# Altium PCB 拉线式变速器-V3.PcbDoc
Units mm, origin at the board's own origin, x right, y up, seen from the top; angles counter-clockwise.
Board outline 55 x 15.8 mm, 4 copper layers (Top Layer, GND, VCC, Bottom Layer), stack 0.778 mm thick; 60 components, 53 nets, 226 pads, 79 vias.
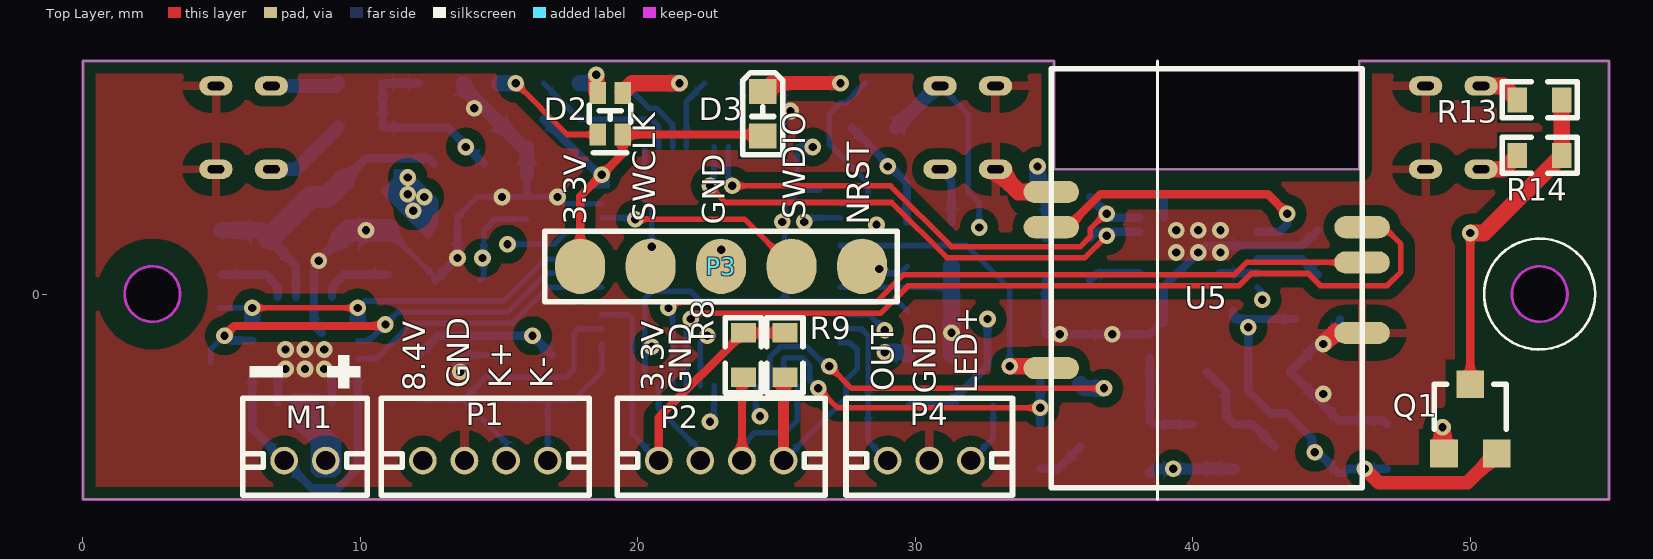
[diagram p0: Top Layer view]
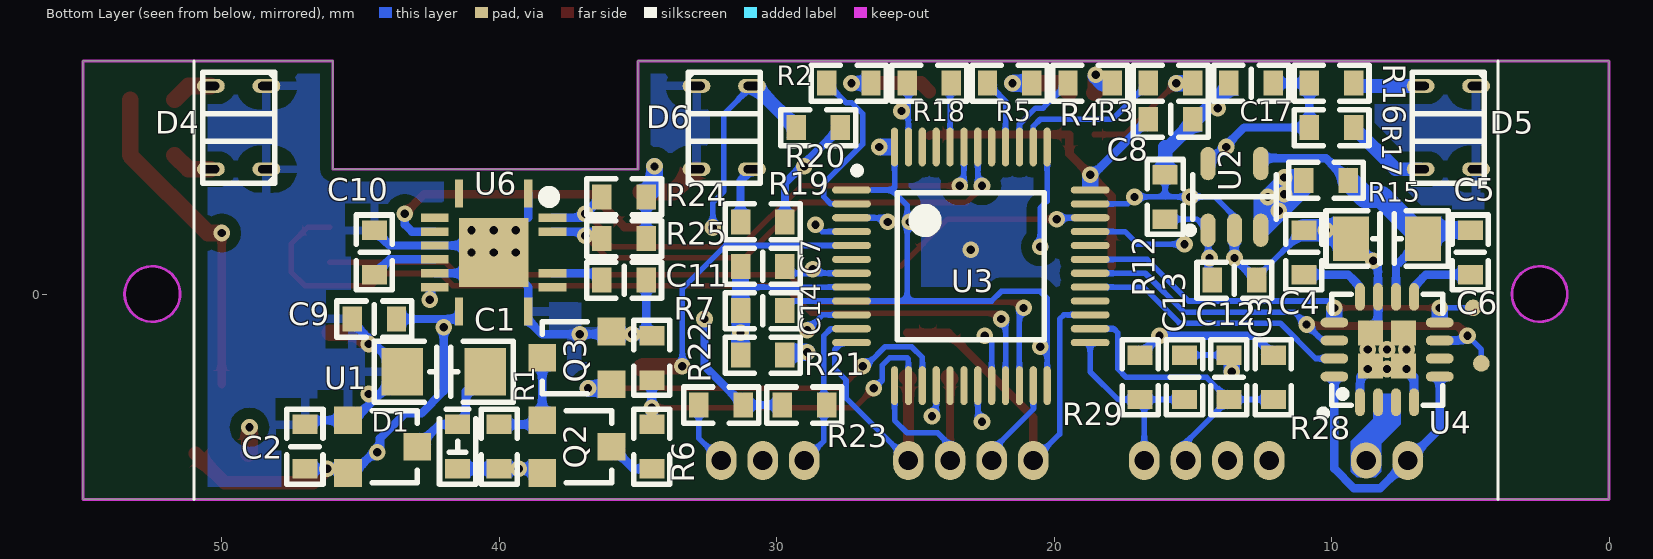
[diagram p1: Bottom Layer view, seen from below]
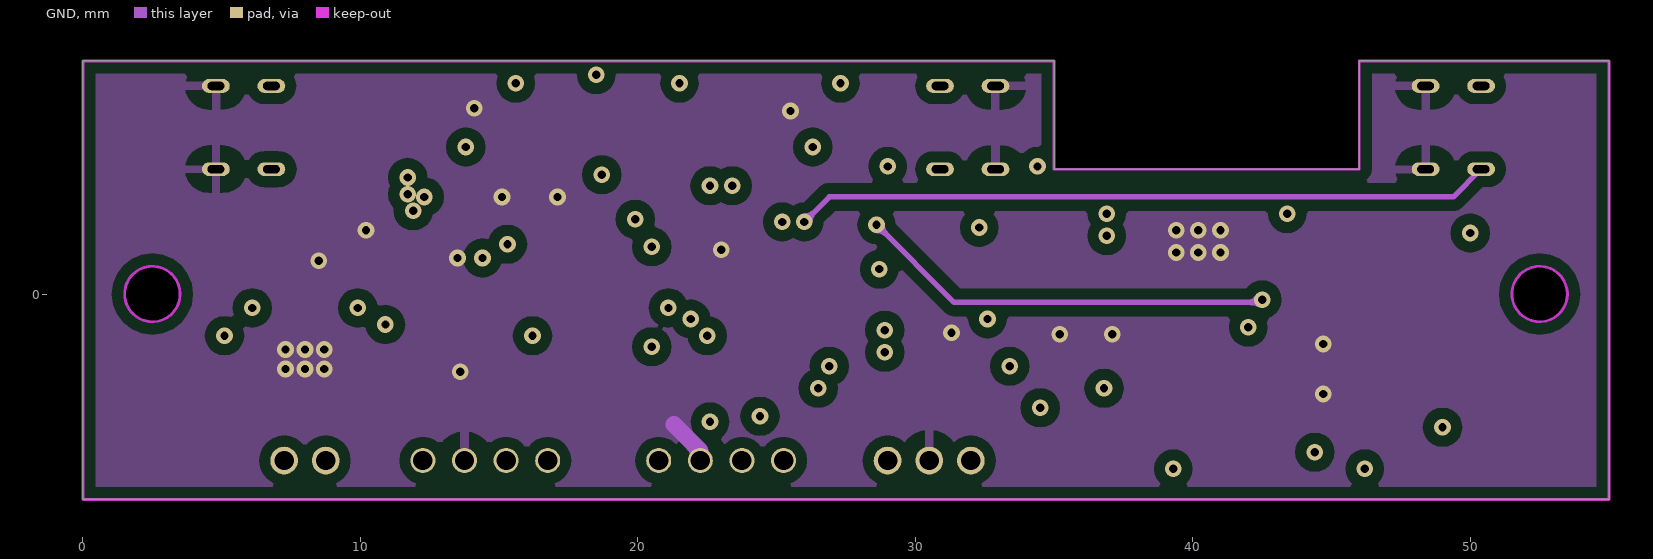
[diagram p2: GND]
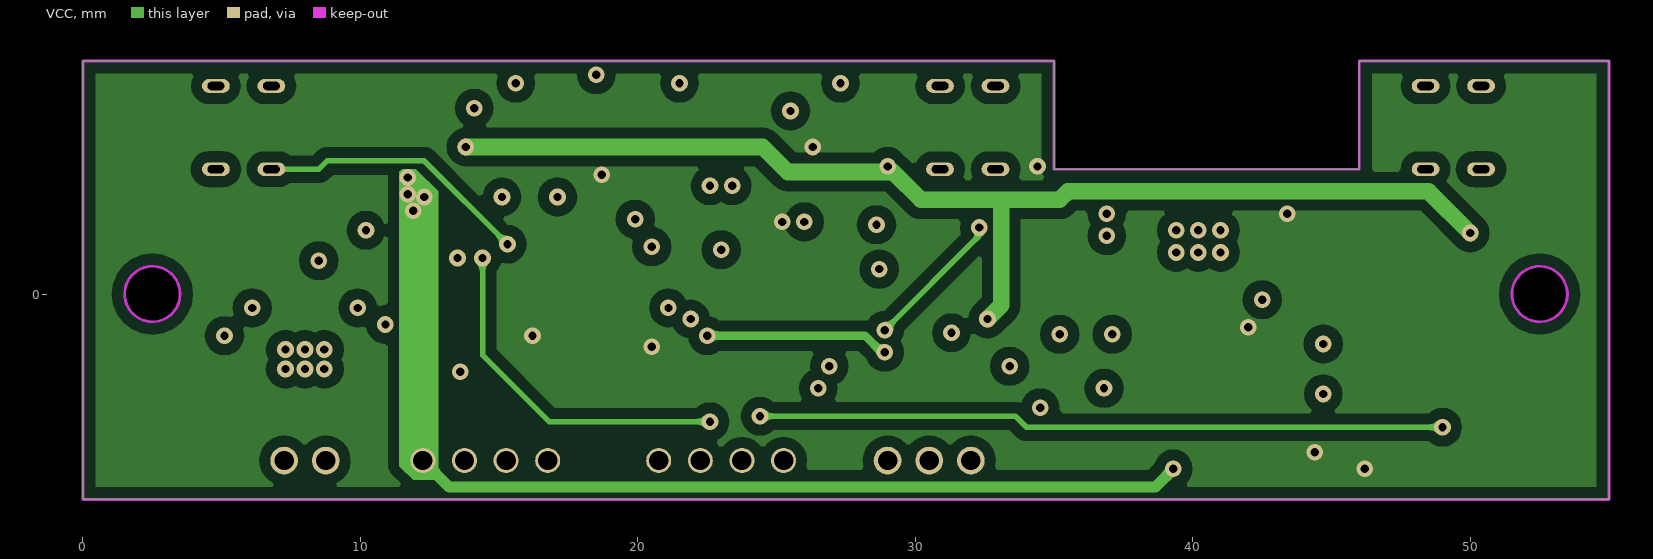
[diagram p3: VCC]
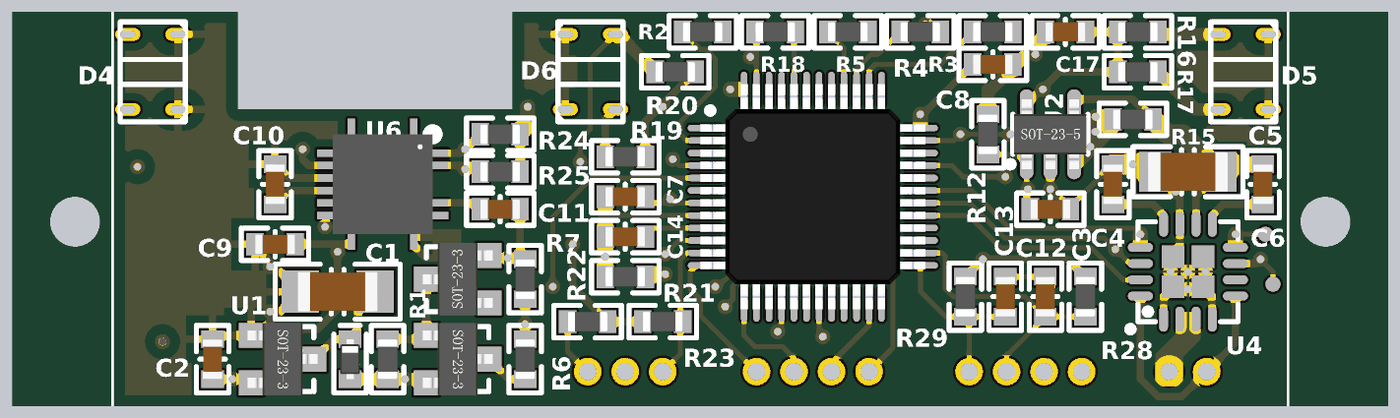
[diagram p4: 3D render of the assembled board from below, using the file's embedded part models]

## Layer stack, top to bottom
Top Solder: solder mask 0.0102, Solder Resist, Dk 3.5
Top Layer: signal copper 0.0356
Dielectric1: core 0.254, FR-4, Dk 4.2
GND: signal copper 0.036
Dielectric 3: prepreg 0.127, Dk 4.2
VCC: signal copper 0.036
Dielectric2: core 0.254, Dk 4.2
Bottom Layer: signal copper 0.0356
Bottom Solder: solder mask 0.0102, Solder Resist, Dk 3.5

## Board outline
0,-7.4 0,8.4 35,8.4 35,4.5 46,4.5 46,8.4 55,8.4 55,-7.4
cut-out: 2.5,-1 cw(c2.5,0) 1.5,0 cw(c2.5,0) 2.5,1 cw(c2.5,0) 3.5,0 cw(c2.5,0)
cut-out: 52.5,-1 cw(c52.5,0) 51.5,0 cw(c52.5,0) 52.5,1 cw(c52.5,0) 53.5,0 cw(c52.5,0)

## Design rules (kind name [scope] priority, off if disabled: settings)
Clearance Clearance敷铜间隔 [InPolygon] p1: gap=0.4
Clearance Clearance通用间隔 [All] p2: gap=0.2
PlaneConnect [All] p1: planeconnectstyle=Relief reliefexpansion=0.508 reliefentries=4 reliefconductorwidth=0.3 reliefairgap=0.3
PolygonConnect PolygonConnect_过孔 [All vs IsVia] p1: connectstyle=Direct reliefconductorwidth=0.254 reliefentries=4 polygonreliefangle="90 Angle" airgapwidth=0.254
PolygonConnect [All] p2: connectstyle=Relief reliefconductorwidth=0.3 reliefentries=4 polygonreliefangle="90 Angle" airgapwidth=0.6
RoomDefinition 拉线式变速器-V3 [InComponentClass('拉线式变速器-V3')] p1: confinementstyle=ConfineIn formatcopy=TRUE lockcomponents=FALSE outline -138.242,-244.193 -87.442,-244.193 -87.442,-218.793 -138.242,-218.793
RoutingVias [All] p1: holewidth=0.5 width=1 viastyle="Through Hole" minholewidth=0.4 minwidth=0.8 maxholewidth=10 maxwidth=10
SolderMaskExpansion [All] p1: expansion=0.102
Width [All] p1: maxlimit=10 minlimit=0.2 preferedwidth=0.5
29 further rules are at their usual default settings.

## Components (designator, comment, footprint, x,y, rotation, side; value= is the part's Value field where it differs from the comment)
C1 "107" C-1206 42,-2.8 r180 bottom
C2 "106" C-0603-M 47,-5.5 r270 bottom
C3 "103" C-0603-M 13.5,0.5 r180 bottom
C4 "225" C-0603-M 11,1.5 r270 bottom
C5 "100UF" C-1206-M 8,2 r180 bottom
C6 "103" C-0603-M 5,1.5 r270 bottom
C7 "104" C-0603-M 30.5,1 r180 bottom
C8 "105" C-0603-M 15.8,6.3 r180 bottom
C9 "104" C-0603-m 44.5,-0.9 r0 bottom
C10 "104" C-0603-m 44.5,1.5 r90 bottom
C11 "222" C-0603-m 35.5,0.5 r180 bottom
C12 "104" C-0603-M 13.7,-3 r270 bottom
C13 "104" C-0603-M 15.3,-3 r270 bottom
C14 "104" C-0603-M 30.5,-0.6 r0 bottom
C17 "104" C-0603-M 12.9,7.6 r0 bottom
D1 "SS14" D-0603-M 41.5,-5.5 r270 bottom
D2 "LED-1615-三色" LED-1615-三色 19,6.5 r0 top
D3 "LED-0603-Blue" LED-0603-Blue 24.5,6.5 r270 top
D4 "GP1S21" RPI-124 49.39,6 r270 bottom
D5 "GP1S21" RPI-124 5.79,6 r270 bottom
D6 "GP1S21" RPI-124 31.89,6 r90 bottom
M1 "" ZH1.5-2P-插件-直针 8,-6 r0 top
P1 "" ZH1.5-4P-插件-直针 14.5,-6 r0 top
P2 "踏频，速度" ZH1.5-4P-插件-直针 23,-6 r0 top
P3 "" 5P下载口 23,1 r0 top locked
P4 "转速" ZH1.5-3P-插件-直针 30.5,-6 r0 top
Q1 "SI2301" SOT-23 50,-4.5 r270 top
Q2 "SI2301" SOT-23 37.2,-5.5 r0 bottom
Q3 "2N7002" SOT-23 37.2,-2.3 r180 bottom
R1 "10K" R-0603-M 40,-5.5 r90 bottom
R2 "100" R-0603-M 27.4,7.6 r180 bottom
R3 "100" R-0603-M 15.8,7.6 r180 bottom
R4 "100" R-0603-M 18.7,7.6 r180 bottom
R5 "100" R-0603-M 21.6,7.6 r180 bottom
R6 "20K-1%" R-0603-M 34.5,-5.5 r90 bottom
R7 "10K-1%" R-0603-M 34.5,-2.3 r90 bottom
R8 "10K" R-0603-m 23.8,-2.2 r270 top
R9 "10K" R-0603-m 25.3,-2.2 r270 top
R12 "250K" R-0603-m 16,3.5 r270 bottom
R13 "1K" R-0603-m 52.5,7 r0 top
R14 "20K" R-0603-m 52.5,5 r0 top
R15 "0.02" R-0603-m 10.2,4.1 r0 bottom
R16 "1K" R-0603-m 10,7.6 r0 bottom
R17 "20K" R-0603-m 10,6 r0 bottom
R18 "4.7K" R-0603-m 24.5,7.6 r0 bottom
R19 "1K" R-0603-m 30.5,2.6 r180 bottom
R20 "20K" R-0603-m 28.5,6 r180 bottom
R21 "4.7K" R-0603-m 30.5,-2.2 r0 bottom
R22 "220" R-0603-m 32,-4 r180 bottom
R23 "10K" R-0603-m 29,-4 r0 bottom
R24 "4.7K" R-0603-M 35.5,3.5 r180 bottom
R25 "4.7K" R-0603-M 35.5,2 r180 bottom
R28 "10K" R-0603-m 12.1,-3 r270 bottom
R29 "10K" R-0603-m 16.9,-3 r270 bottom
U1 "SE8533-LF" SOT-23 44.2,-5.5 r0 bottom
U2 "INA138" SOT-23-5-N 13.5,3.5 r270 bottom
U3 "GD32F103C8T6" LQFP48-L 23,1 r270 bottom locked
U4 "DRV8833RTY" QFN-16+1 8,-2 r180 bottom
U5 "RF-BM-S02" RF-BM-S02 40.5,-1.4 r90 top locked
U6 "MPU6050" QFN-24 40.2,1.5 r0 bottom

## Footprints (in the part's own frame and the unit in brackets; to place one, negate y for a bottom-side part, rotate by r counter-clockwise, add the part's x,y. Pads: shape width x height; smd on the part's side, far side on the other; paste and mask are expansions set on the pad)
5P下载口 [mm]
  oval 1.8x2 smd paste-1: 1(-5.08,0) 2(-2.54,0) 3(0,0) 4(2.54,0) 5(5.08,0)
  silkscreen extent -6.35,-1.27 6.35,1.27
C-0603-M [mm]
  rect 0.7x0.9 smd: 1(-0.8,0) 2(0.8,0)
  silkscreen extent -1.35,-0.65 1.35,0.65, body extent -0.8,-0.4 0.8,0.4, height 0.6
C-0603-m [mm]
  rect 0.7x0.9 smd: 1(-0.8,0) 2(0.8,0)
  silkscreen extent -1.35,-0.65 1.35,0.65, body extent -0.8,-0.4 0.8,0.4, height 0.6
C-1206 [mm]
  rect 1.5x1.7 smd: 1(-1.5,0) 2(1.5,0)
  silkscreen extent -2.5,-1.1 2.5,1.1, body extent -1.6,-0.8 1.6,0.8, height 0.95
C-1206-M [mm]
  rect 1.3x1.6 smd: 1(-1.3,0) 2(1.3,0)
  silkscreen extent -2.2,-1 2.2,1, body extent -1.6,-0.8 1.6,0.8, height 0.95
D-0603-M [mm]
  rect 0.7x0.9 smd: 1(0.8,0) 2(-0.8,0)
  silkscreen extent -1.35,-0.65 1.35,0.65, body extent -0.8,-0.4 0.8,0.4, height 0.7
LED-0603-Blue [mm]
  rect 0.9x1 smd: 1(0.8,0) 2(-0.8,0)
  silkscreen extent -1.48,-0.72 1.48,0.72, body extent -0.81,-0.4 0.81,0.4, height 0.6
LED-1615-三色 [mm]
  rect 0.6x0.8 smd: 1(-0.45,-0.75) 2(0.45,-0.75) 3(0.45,0.75) 4(-0.45,0.75)
  silkscreen extent -0.75,-1.4 0.75,0.3, body extent -0.75,-0.8 0.75,0.8, height 0.55
LQFP48-L [mm]
  oval 0.26x1.4 smd: 1(-2.75,-4.3) 2(-2.25,-4.3) 3(-1.75,-4.3) 4(-1.25,-4.3) 5(-0.75,-4.3) 6(-0.25,-4.3) 7(0.25,-4.3) 8(0.75,-4.3) 9(1.25,-4.3) 10(1.75,-4.3) 11(2.25,-4.3) 12(2.75,-4.3) 25(2.75,4.3) 26(2.25,4.3) 27(1.75,4.3) 28(1.25,4.3) 29(0.75,4.3) 30(0.25,4.3) 31(-0.25,4.3) 32(-0.75,4.3) 33(-1.25,4.3) 34(-1.75,4.3) 35(-2.25,4.3) 36(-2.75,4.3)
  oval 1.4x0.26 smd: 13(4.3,-2.75) 14(4.3,-2.25) 15(4.3,-1.75) 16(4.3,-1.25) 17(4.3,-0.75) 18(4.3,-0.25) 19(4.3,0.25) 20(4.3,0.75) 21(4.3,1.25) 22(4.3,1.75) 23(4.3,2.25) 24(4.3,2.75) 37(-4.3,2.75) 38(-4.3,2.25) 39(-4.3,1.75) 40(-4.3,1.25) 41(-4.3,0.75) 42(-4.3,0.25) 43(-4.3,-0.25) 44(-4.3,-0.75) 45(-4.3,-1.25) 46(-4.3,-1.75) 47(-4.3,-2.25) 48(-4.3,-2.75)
  silkscreen extent -3.57,-4.23 2.65,2.65, body extent -4.5,-4.5 4.5,4.5, height 1.5
QFN-16+1 [mm]
  oval 0.35x1 smd: 1(-0.975,-1.9) 2(-0.325,-1.9) 3(0.325,-1.9) 4(0.975,-1.9) 9(0.975,1.9) 10(0.325,1.9) 11(-0.325,1.9) 12(-0.975,1.9)
  oval 1x0.35 smd: 5(1.9,-0.975) 6(1.9,-0.325) 7(1.9,0.325) 8(1.9,0.975) 13(-1.9,0.975) 14(-1.9,0.325) 15(-1.9,-0.325) 16(-1.9,-0.975)
  rect 0.9x0.9 smd: 17(-0.6,-0.6) 17(-0.6,0.6) 17(0.6,-0.6) 17(0.6,0.6)
  silkscreen extent -2.4,-2.4 2,2, body extent -2,-2 2,2, height 0.8
QFN-24 [mm]
  rect 0.3x1 smd: 1(-1.25,-2.125) 6(1.25,-2.125) 13(1.25,2.125) 18(-1.25,2.125)
  rect 1x0.3 smd: 7(2.125,-1.25) 8(2.125,-0.75) 9(2.125,-0.25) 10(2.125,0.25) 11(2.125,0.75) 12(2.125,1.25) 19(-2.125,1.25) 20(-2.125,0.75) 23(-2.125,-0.75) 24(-2.125,-1.25)
  rect 2.5x2.5 smd: 25(0,0)
  silkscreen extent -2.2,-2.2 -1.8,-1.8, body extent -2,-2 2,2, height 0.9
R-0603-M [mm]
  rect 0.7x0.9 smd: 1(-0.8,0) 2(0.8,0)
  silkscreen extent -1.35,-0.65 1.35,0.65, body extent -0.8,-0.4 0.8,0.4, height 0.38
R-0603-m [mm]
  rect 0.7x0.9 smd: 1(-0.8,0) 2(0.8,0)
  silkscreen extent -1.35,-0.65 1.35,0.65, body extent -0.8,-0.4 0.8,0.4, height 0.38
RF-BM-S02 [mm]
  oval 0.8x2 smd: 1(5.08,5.6) 2(3.81,5.6) 6(-1.27,5.6) 14(0,-5.6) 16(2.54,-5.6) 17(3.81,-5.6)
  silkscreen extent -5.58,-5.6 9.52,5.6, body extent -5.58,-5.6 9.52,5.6, height 1.3
RPI-124 [mm]
  oval 0.5x1 / inner oval 0.5x1 / far side oval 0.7x1.2 hole 0.3 slot 0.6 at 90 deg: 1(-1.5,-1) 2(-1.5,1) 3(1.5,1) 4(1.5,-1)
  silkscreen extent -2,-1.3 2,1.3, body extent -2,-1.3 2,1.3, height 3.3
SOT-23 [mm]
  rect 1x1 smd: 1(1.25,-0.95) 2(1.25,0.95) 3(-1.25,0)
  silkscreen extent -1.25,-1.3 0.38,1.3, body extent -1.4,-1.45 1.4,1.45, height 1.2
SOT-23-5-N [mm]
  oval 1.2x0.55 smd: 1(1.2,-0.95) 2(1.2,0) 3(1.2,0.95) 4(-1.2,0.95) 5(-1.2,-0.95)
  silkscreen extent -0.8,-1.7 1.3,1.5, body extent -1.4,-1.45 1.4,1.45, height 1.2
ZH1.5-2P-插件-直针 [mm]
  round 1 / inner round 1 / far side oval 1.1x1.4 hole 0.7: 1(-0.75,0)
  round 1 / inner round 1 / far side oval 1.1x1.3 hole 0.7: 2(0.75,0)
  silkscreen extent -2.25,-1.25 2.25,2.25
ZH1.5-3P-插件-直针 [mm]
  round 1 / inner round 1 / far side oval 1.1x1.4 hole 0.7: 1(-1.5,0) 2(0,0) 3(1.5,0)
  silkscreen extent -3,-1.25 3,2.25
ZH1.5-4P-插件-直针 [mm]
  round 1 / inner round 0.9 / far side oval 1.1x1.4 hole 0.7: 1(-2.25,0) 2(-0.75,0) 3(0.75,0) 4(2.25,0)
  silkscreen extent -3.75,-1.25 3.75,2.25

## Part data
C1 C2 C3 C4 C6 C7 C9 C10 C11 C12 C13 C14 C17: library part Cap-0603, "0805"
C5: library part Cap-0805, "0805"
C8: library part Cap, "0805"
D1: "SMA"
D4 D5 D6: "光电"
M1: library part "Motor Servo", "直流电机"
P1 P2: library part "Header 4", "Header, 4-Pin"
P3: library part "Header 5", "Header, 5-Pin"
P4: library part "Header 3", "Header, 3-Pin"
Q1 Q2: "SOT-23"
Q3: library part SI2300, "SOT-23"
R1 R2 R3 R4 R5 R6 R7 R8 R9 R12 R13 R14 R15 R16 R17 R18 R19 R20 R21 R22 R23 R24 R25 R28 R29: library part Res2-0603, "0603"
U4: "刷式电机驱动芯片"
U6: "三轴陀螺仪加速度传感器"

## Free pads (board coordinates)
  round 0.6 smd far side: 2(4.6,-2.5) 3(4.9,-0.5)

## Via types
v1: diameter 0.6, hole 0.3, Top Layer to Bottom Layer, tented both sides, 79 vias

## Nets (pads, with @x,y where several pads share a name; then routed paths per layer and width w, separated by ;. In a path a pad name is that pad's centre, name@x,y a point inside that pad or via, vN(x,y) a via of type N, cw(c..) or ccw(c..) an arc to the next point about the centre after c; other vN are vias at no path point)
3.3V: C2.2 C8.1 C9.1 C14.1 D2.2 D3.1 P3.1 Q1.2 R24.2 R25.2 R28.1 R29.1 U1.2 U3.1 U3.9 U3.24 U3.36 U3.48 U5.2 U6.8 U6.13 | length 68.8
  Top Layer w0.3: P3.1 17.92,3.52 v1(18.7,4.3) 19.45,5.05 D2.2 24.45,5.75 D3.1 ; U5.2 35.491,2.41 36.681,3.6 42.7,3.6 v1(43.4,2.9)
  Top Layer w0.5: v1(46.2,-6.3) 46.7,-6.8 49.9,-6.8 Q1.2
  Bottom Layer w0.2: U3.24 20.25,-0.15 20.5,0.1 21.9,0.1 22.25,-0.25 25.3,-0.25 ; U3.48 25.75,3.85 25.85,3.75 ; 26.55,3.75 25.85,3.75 ; C14.1 29.35,-0.25 U3.9 25.3,-0.25 ; 25.3,-0.25 25.3,3.2 25.85,3.75
  Bottom Layer w0.3: R28.1 12.8,-1.5 v1(16.2,-1.5) R29.1 ; C8.1 v1@18.6,4.3 ; R25.2 R24.2 ; U6.13 41.45,-0.85 41.5,-0.9 42,-0.9 ; U6.8 43.15,2.25 43.4,2.5 v1(43.4,2.9) v1@43.4,3 ; C9.1 42,-0.9 ; C2.2 45.6,-6.3 U1.2 45.25,-6.45 44.3,-5.5 44.3,-5.2 43.4,-4.3 42.8,-4.3 42,-3.5 42,-0.9
  Bottom Layer w0.6: v1(34.4,4.6) 34.4,3.8 R24.2
  other v1: 44.4,-5.7 20.5,-1.9 42,-1.2 25.2,2.6 26.3,5.3
3.3V-OUT: C17.1 Q1.3 R13.2 R14.2 R16.2 R17.2 R19.2 R20.2 R22.2 R23.2 U2.5 | length 70.5
  Top Layer w0.3: Q1.3 v1(50,2.2)
  Top Layer w0.6: v1(50,2.2) 50.5,2.2 R14.2 R13.2
  VCC w0.6: v1(13.8,5.3) 24.5,5.3 25.4,4.4 29.2,4.4 30.2,3.4 33.1,3.4 ; v1(32.6,-0.9) 33.1,-0.4 33.1,3.4 ; v1(50,2.2) 48.5,3.7 35.5,3.7 35.2,3.4 33.1,3.4
  Bottom Layer w0.3: C17.1 R16.2 R17.2 13.15,6 U2.5 ; R20.2 29.7,4 R19.2 ; R23.2 R22.2 32.6,-2.6 v1(32.6,-0.9)
  other v1: 29,4.6
3.3V使能: Q1.1 U3.16 | length 26.9
  Top Layer w0.6: v1(49,-4.8) 49,-5.7 Q1.1
  VCC w0.2: v1(24.4,-4.4) 33.6,-4.4 34,-4.8 v1(49,-4.8)
  Bottom Layer w0.2: U3.16 24.25,-4.25 v1(24.4,-4.4)
8.4V: D1.1 P1.1 Q2.2 R1.1 R15.2 U2.3 | length 30.8
  VCC w0.4: P1.1 13.2,-6.95 38.65,-6.95 v1(39.3,-6.3)
  Bottom Layer w0.4: Q2.2 38.6,-6.3 R1.1 D1.1
  other v1: 11.9,3 12.3,3.5 11.7,3.6 11.7,4.2
GND: C1.1 C2.1 C3.2 C4.1 C5.1 C7.1 C8.2 C9.2 C10.2 C11.2 C12.1 C13.1 C14.2 C17.2 D4.2 D4.3 D5.2 D5.3 D6.2 D6.3 P1.2 P2.2 P3.3 P4.2 Q3.2 R7.2 R12.1 R18.2 R21.2 U1.1 U2.2 U3.8 U3.23 U3.35 U3.47 U4.1 U4.4 U4.11 U4.17 U5.1 U5.14 U6.1 U6.9 U6.11 U6.18 U6.25 | length 67.6
  Top Layer w0.6: D6.2 33.71,3.68 U5.1 ; v1(44.7,-1.8) 45.1,-1.4 U5.14
  GND w0.6: 21.3,-4.7 22.25,-5.65 P2.2
  Bottom Layer w0.2: C4.1 12.7,0.6 C3.2 ; U2.2 13.5,2.8 14.2,3.5 16,3.5 ; C12.1 C13.1 ; R12.1 16,3.5 ; U3.35 17.35,3.25 v1(17.1,3.5) 16,3.5 ; U3.23 20.75,-4.15 22.25,-5.65 P2.2 ; U3.47 R18.2@25.25,7.55 ; U3.8 31.3,0.25
  Bottom Layer w0.3: U4.4 7.025,-2.975 U4.17@7.4,-2.6 ; v1@8.325,1.025 U4.11 8.325,-1.125 U4.17@8.6,-1.4 ; v1(8.5,1.2) C5.1 ; U4.17@8.6,-2.6 8.975,-2.975 U4.1 ; C3.2 v1(13.5,1.3) U2.2 ; R7.2@34.7,-1.45 38.45,-1.45 38.95,-0.95 U6.18 38.95,0.25 v1(40.2,1.5) ; R7.2@34.7,-1.3 C11.2 ; 38.95,2.75 U6.1 ; U6.25@40.45,1.75 U6.9 43.95,1.75 C10.2 ; U6.25@40.95,0.75 U6.11 ; C9.2 45.3,-1 C1.1 45.25,-4.55 U1.1 46.85,-4.55 C2.1
  Bottom Layer w0.5: C17.2 13.7,7.464 15.864,5.3 16,5.3 R12.1
  Bottom Layer w0.6: v1(13.6,-2.8) 13.6,-2.3 C12.1 ; R21.2 C14.2 31.3,0.25 C7.1
  Bottom Layer w0.8: C5.1 9.6,2.3 C4.1
  other v1: 44.7,-3.6 7.3,-2.7 8,-2.7 8.7,-2.7 7.3,-2 8,-2 8.7,-2 35.2,-1.45 37.1,-1.45 31.3,-1.4 39.4,1.5 41,1.5 23,1.6 10.2,2.3 39.4,2.3 40.2,2.3 41,2.3 15.1,3.5 25.5,6.6 14.1,6.7
IN1: pad.2 U3.30 U4.7 U4.14 | length 18
  Top Layer w0.3: v1(5.1,-1.5) 5.45,-1.15 10.85,-1.15 v1(10.9,-1.1)
  Bottom Layer w0.2: pad.2 4.6,-2 v1(5.1,-1.5) ; U4.14 10.325,-1.675 v1(10.9,-1.1) 11.35,-0.65 15.316,-0.65 16.716,0.75 U3.30
  Bottom Layer w0.3: v1(5.1,-1.5) 5.275,-1.675 U4.7
IN2: pad.3 U3.31 U4.8 U4.13 | length 14.5
  Top Layer w0.2: v1(6.1,-0.5) v1(9.9,-0.5)
  Bottom Layer w0.2: pad.3 v1(6.1,-0.5) ; v1(9.9,-0.5) 10.15,-0.25 15.15,-0.25 16.65,1.25 U3.31
INT: U3.4 U6.12 | length 17
  GND w0.2: v1(28.6,2.5) 31.4,-0.3 v1@42.5,-0.3
  Bottom Layer w0.2: U3.4 28.35,2.25 v1(28.6,2.5) ; U6.12 42.5,0.075 v1(42.5,-0.2)
NetC1_2: C1.2 D1.2 U1.3 | length 4.1
  Bottom Layer w0.3: C1.2 41.2,-3.5 41.2,-4.4 D1.2 42.15,-4.7 U1.3
NetC4_2: C4.2 U4.12 | length 2.6
  Bottom Layer w0.3: U4.12 8.975,0.275 9.4,0.7 C4.2
NetC5_2: C5.2 C6.1 R15.1 U2.4 U4.10 | length 11.6
  Bottom Layer w0.3: C5.2 7.675,1.025 U4.10 ; R15.1 10.2,4.9 12.45,4.9 U2.4@12.65,4.7
  Bottom Layer w0.6: C6.1 6.4,2.3 C5.2
  Bottom Layer w0.8: C5.2 8.2,3.5 8.8,3.5 R15.1
NetC6_2: C6.2 U4.9 | length 2.6
  Bottom Layer w0.3: C6.2 6.6,0.7 7.025,0.275 U4.9
NetC10_1: C10.1 U6.10 | length 2.4
  Bottom Layer w0.3: U6.10 43.95,1.25 C10.1
NetC11_1: C11.1 U6.20 | length 1.9
  Bottom Layer w0.3: C11.1 36.55,0.75 U6.20
NetD2_1: D2.1 R3.2 | length 4.3
  Top Layer w0.2: v1(15.6,7.6) 17.45,5.75 D2.1
  Bottom Layer w0.6: R3.2 v1(15.6,7.6)
NetD2_3: D2.3 R5.2 | length 2.9
  Top Layer w0.6: D2.3 19.8,7.6 v1(21.5,7.6)
  Bottom Layer w0.6: R5.2 v1(21.5,7.6)
NetD2_4: D2.4 R4.2 | length 1.3
  Top Layer w0.6: v1@18.5,7.85 18.5,7.3 D2.4
  Bottom Layer w0.6: R4.2 18.25,7.6 v1@18.5,7.85
  other v1: 18.5,7.9
NetD3_2: D3.2 R2.2 | length 3.6
  Top Layer w0.5: D3.2 24.8,7.6 v1(27.3,7.6)
  Bottom Layer w0.5: R2.2 v1(27.3,7.6)
NetD4_1: D4.1 R13.1 | length 1.5
  Top Layer w0.6: D4.1 51.2,7.5 R13.1
NetD5_1: D5.1 R16.1 | length 2.5
  Bottom Layer w0.5: D5.1 9.1,7.5 R16.1
NetD6_1: D6.1 R19.1 | length 2.1
  Bottom Layer w0.3: D6.1 31.3,4.09 R19.1
NetM1_1: M1.1 U4.5 U4.16 | length 10.2
  Bottom Layer w0.3: U4.5 6.1,-4.85 M1.1 8.25,-7 9.195,-7 9.9,-6.295 U4.16
NetM1_2: M1.2 U4.2 U4.3
NetP4_3: P4.3 R22.1 | length 2.3
  Bottom Layer w0.2: P4.3 32.8,-5.2 R22.1
NetQ2_1: Q2.1 Q3.3 R1.2 | length 3.9
  Bottom Layer w0.3: Q3.3 Q2.1 38.6,-4.7 R1.2
NetQ2_3: Q2.3 R6.1 | length 1.8
  Bottom Layer w0.3: R6.1 35.15,-6.3 Q2.3
NetR18_1: R18.1 U3.44 | length 2.3
  Bottom Layer w0.2: R18.1 23.75,7.55 U3.44
NetR21_1: R21.1 U3.20 | length 9.4
  VCC w0.3: v1(22.5,-1.5) 28.181,-1.5 28.781,-2.1 v1(28.9,-2.1)
  Bottom Layer w0.2: U3.20 22.25,-1.75 v1(22.5,-1.5)
  Bottom Layer w0.6: v1(28.9,-2.1) 29.6,-2.1 R21.1
NRST: C7.2 P3.5 U3.7 | length 2.5
  Bottom Layer w0.2: U3.7 29.45,0.75 C7.2
  other v1: 28.7,0.9
SCL: R25.1 U3.42 U6.23 | length 19.1
  Top Layer w0.2: v1(22.6,3.9) 22.6,3.851 23.151,3.3 29.144,3.3 31.134,1.31 36.11,1.31 v1(36.9,2.1)
  Bottom Layer w0.2: v1(22.6,3.9) 22.75,4.05 U3.42
  Bottom Layer w0.3: R25.1 36.55,2.25 U6.23
SDA: R24.1 U3.43 U6.24 | length 18.6
  Top Layer w0.2: v1(23.4,3.9) 29.11,3.9 31.3,1.71 35.944,1.71 36.3,2.066 36.3,2.349 36.851,2.9 v1(36.9,2.9)
  Bottom Layer w0.2: U3.43 23.25,4.05 v1(23.4,3.9)
  Bottom Layer w0.3: R24.1 v1(36.9,2.9) 37.05,2.75 U6.24
SLEEP: U3.29 U4.15 | length 9.9
  Bottom Layer w0.2: U4.15 10.575,-2.325 11.85,-1.05 15.481,-1.05 16.781,0.25 U3.29
SWCLK: P3.2 U3.37 | length 3.8
  Bottom Layer w0.2: U3.37 20.25,3.35 20.5,3.1 v1@20.5,1.8 ; v1@20.3,1.7 v1(20.5,1.7)
SWDIO: P3.4 U3.34 | length 7.6
  Top Layer w0.2: v1(19.9,2.7) 23.84,2.7 P3.4
  Bottom Layer w0.2: U3.34 19.85,2.75 v1(19.9,2.7)
̤Ƶ: P2.3 R8.2 U3.13 | length 7.2
  Top Layer w0.3: P2.3 R8.2@23.75,-3.05
  Top Layer w0.6: R8.2@23.75,-3.05 R8.2
  Bottom Layer w0.2: P2.3 23.75,-5.45 24.2,-5 25.3,-5 25.75,-4.55 U3.13
光耦-校准: D6.4 R20.1 U3.10 | length 14.6
  VCC w0.2: v1(28.9,-1.3) 32.3,2.1 v1@32.3,2.2
  Bottom Layer w0.2: U3.10 28.35,-0.75 v1(28.9,-1.3) ; D6.4 31.9,6.49 31.9,3.7 32.3,3.3 v1(32.3,2.4)
  Bottom Layer w0.5: R20.1 30.8,7.5 D6.4
光耦-转速: P4.1 R23.1 U3.11 | length 5.9
  Bottom Layer w0.2: U3.11 28.05,-1.25 28.3,-1.5 28.3,-5.3 P4.1
光耦-限位前: D4.4 R14.1 U3.3 | length 28.1
  Top Layer w0.6: D4.4 51.2,4.5 R14.1
  GND w0.2: v1(26,2.6) 26.9,3.5 49.39,3.5 D4.4
  Bottom Layer w0.2: v1(26,2.6) 26.15,2.75 U3.3
光耦-限位后: D5.4 R17.1 U3.33 | length 16.5
  VCC w0.2: D5.4 8.5,4.5 8.8,4.8 12.3,4.8 v1(15.3,1.8)
  Bottom Layer w0.2: v1(15.3,1.8) 17,1.8 17.45,2.25 U3.33
  Bottom Layer w0.5: D5.4 7.7,4.5 R17.1
按键-减档: C13.2 P1.4 R29.2 U3.25 | length 7.1
  Bottom Layer w0.2: C13.2 R29.2 ; P1.4 16.75,-3.95 R29.2 ; U3.25@18.7,-1.8 18.7,-2.8 17.7,-3.8 R29.2
按键-加档: C12.2 P1.3 R28.2 U3.26 | length 11.3
  Bottom Layer w0.2: R28.2 C12.2 ; P1.3 15.25,-5.35 C12.2 ; U3.26 18.05,-1.25 17.85,-1.25 17.7,-1.4 17.7,-1.6 17.7,-2.7 17.4,-3 14.5,-3 C12.2
状态指示灯: R2.1 U3.2 | length 6.4
  Bottom Layer w0.2: U3.2 28.05,3.25 28.3,3.5 28.3,4 26.9,5.4 26.9,6.5 27.3,6.9 27.5,6.9 R2.1
电机电流: C3.1 R12.2 U2.1 U3.19 | length 17.6
  VCC w0.2: v1(14.4,1.3) 14.4,-2.2 16.8,-4.6 v1(22.6,-4.6)
  Bottom Layer w0.2: C3.1 14.45,0.65 U2.1 14.85,2.7 R12.2 ; v1(22.6,-4.6) 22.75,-4.45 U3.19
电源电压检测: R6.2 R7.1 U3.14 | length 12.9
  Top Layer w0.2: v1(26.5,-3.4) 27.2,-4.1 v1(34.5,-4.1)
  Bottom Layer w0.2: U3.14 25.25,-2.35 25.3,-2.3 25.928,-2.3 26.2,-2.572 26.2,-3.1 v1(26.5,-3.4)
  Bottom Layer w0.3: R6.2 v1(34.5,-4.1) R7.1
电源电压检测使能: Q3.1 U3.15 | length 14.5
  Top Layer w0.2: v1(26.9,-2.6) 27.7,-3.4 v1(36.8,-3.4)
  Bottom Layer w0.2: U3.15 24.75,-2.284 25.134,-1.9 26.094,-1.9 v1@26.694,-2.5
  Bottom Layer w0.6: Q3.1 36.1,-3.4 v1(36.8,-3.4)
电量-B: R5.1 U3.40 | length 2.6
  Bottom Layer w0.2: U3.40 21.75,6.95 R5.1
电量-G: R4.1 U3.39 | length 3.2
  Bottom Layer w0.2: R4.1 20.4,6.7 20.666,6.7 21.25,6.116 U3.39
电量-R: R3.1 U3.38 | length 5.5
  Bottom Layer w0.2: R3.1 17.9,6.3 20.5,6.3 20.75,6.05 U3.38
蓝牙-EN: U3.5 U5.6 | length 11.1
  Top Layer w0.6: v1(33.4,-2.6) 34.83,-2.6 U5.6
  Bottom Layer w0.2: U3.5 31.85,1.75 33.4,0.2 v1(33.4,-2.6)
蓝牙-RXD: U3.22 U5.16 | length 28.5
  Top Layer w0.2: v1(21.1,-0.5) 21.3,-0.3 28.577,-0.3 29.577,0.7 41.5,0.7 41.94,1.14 U5.16
  Bottom Layer w0.2: v1(21.1,-0.5) 21.25,-0.65 U3.22
蓝牙-TXD: U3.21 U5.17 | length 31.8
  Top Layer w0.2: v1(21.9,-0.9) 22.1,-0.7 28.743,-0.7 29.743,0.3 41.666,0.3 42.106,0.74 44.16,0.74 44.6,0.3 47,0.3 47.5,0.8 47.5,1.8 46.89,2.41 U5.17
  Bottom Layer w0.2: U3.21 21.75,-1.05 v1(21.9,-0.9)
速度: P2.4 R9.2 U3.12 | length 8.8
  Top Layer w0.4: P2.4 R9.2@25.25,-3.05
  Top Layer w0.6: R9.2@25.25,-3.05 R9.2
  Bottom Layer w0.2: P2.4 27.5,-3.75 27.5,-3.1 27.9,-2.7 27.9,-2 27.65,-1.75 U3.12
霍尔传感器电源: P2.1 R8.1 R9.1 U3.27 | length 14
  Top Layer w0.3: P2.1 20.75,-4.45 R8.1 R9.1
  Bottom Layer w0.2: U3.27 19.65,-0.75 19.8,-0.9 19.8,-5.05 P2.1
pads on no net: U3.6 U3.17 U3.18 U3.28 U3.32 U3.41 U3.45 U3.46 U4.6 U6.6 U6.7 U6.19

## Polygon pours and split planes (outlines as drawn)
GND on Bottom Layer "Mechanical 15-No Net" (solid, remove dead copper, pour order 16): 4.5,8.4 4.5,-7.4 50.5,-7.4 50.5,8.4
GND on Top Layer "Mechanical 15-No Net" (solid, remove dead copper, pour order 18): 0,8.4 0,-7.4 55,-7.4 55,8.4
GND on GND "Mechanical 15-No Net" (solid, remove dead copper, pour order 20): 0,-7.4 0,8.4 55,8.4 55,-7.4
3.3V on VCC "Mechanical 15-No Net" (solid, remove dead copper, pour order 22): 0,-7.4 0,8.4 55,8.4 55,-7.4

## Keep-outs
Keep-Out Layer:
  circle w0.1: c52.5,0 r1
  circle w0.1: c2.5,0 r1
  lines w0.1: 0,-7.4 55,-7.4 55,8.4 46,8.4 46,4.5 35,4.5 35,8.4 0,8.4 0,-7.4

## Other copper
Top Layer:
  pour cut-out: 52.5,-2 cw(c52.5,0) 50.5,0 cw(c52.5,0) 52.5,2 cw(c52.5,0) 54.5,0 cw(c52.5,0)
  pour cut-out: 2.5,-2 cw(c2.5,0) 0.5,0 cw(c2.5,0) 2.5,2 cw(c2.5,0) 4.5,0 cw(c2.5,0)
VCC:
  region net 8.4V: 12.8,3.7 12,4.5 11.5,4.5 11.4,4.4 11.4,-6.2 11.9,-6.7 12.7,-6.7 12.8,-6.6
Bottom Layer:
  region net 3.3V: 25.8,5.6 25.8,5 26.3,5 26.3,5.6
  rectangle net 3.3V: 18.4,3.8 19,4.3
  region net IN2: 10.2,-0.5 9.6,-0.5 9.6,-1 10.2,-1
  rectangle net IN2: 5.8,-1 6.4,-0.5
  region net 8.4V: 12.8,2.5 12.8,3.4 11.7,4.5 11.2,4.5 11.2,4.2 10.7,3.7 12.4,2 12.5,2
  region net NetM1_2: 7.5,-3.6 8.5,-3.6 8.5,-4.5 9.3,-5.3 9.3,-6.4 9.1,-6.6 8.4,-6.6 8.2,-6.4 8.2,-5.4 7.5,-4.7

## Silkscreen, mask and mechanical layers (free items; w line width, h text height)
Top Overlay:
  circle w0.1: c52.5,0 r2
  region: 7.2,-3 7.2,-2.6 6,-2.6 6,-3
  region: 10,-3 10,-2.6 8.8,-2.6 8.8,-3
  rectangle: 9.2,-3.4 9.6,-2.2
  lines w0.1: 38.723,-7.4 38.723,8.4
  text "SWDIO" at 26.3,2.7 h1.4 r90
  text "SWCLK" at 20.9,2.6 h1.4 r90
  text "3.3V" at 18.4,2.5 h1.4 r90
  text "GND" at 23.4,2.5 h1.4 r90
  text "NRST" at 28.6,2.5 h1.4 r90
  text "GND" at 14.2,-3.4 h1.4 r90
  text "K+" at 15.7,-3.4 h1.4 r90
  text "K-" at 17.2,-3.4 h1.4 r90
  text "8.4V" at 12.6,-3.5 h1.4 r90
  text "3.3V" at 21.2,-3.5 h1.4 r90
  text "OUT" at 29.5,-3.5 h1.4 r90
  text "GND" at 22.2,-3.6 h1.4 r90
  text "GND" at 31,-3.6 h1.4 r90
  text "LED+" at 32.5,-3.6 h1.4 r90
Bottom Overlay:
  lines w0.1: 4,-7.4 4,8.4 ; 51,-7.4 51,8.4
Mechanical 15:
  lines w0.2: -14.742,-73.993 73.258,-73.993 ; -14.742,-67.993 73.258,-67.993 ; -14.742,-61.993 73.258,-61.993 ; -14.742,-55.993 73.258,-55.993 ; -14.742,-49.993 73.258,-49.993 ; -14.742,-43.993 73.258,-43.993 ; -14.742,-37.993 73.258,-37.993 ; 7.258,-79.993 7.258,-31.993 7.258,-25.993 ; -14.742,-31.993 -14.742,-25.993 73.258,-25.993 73.258,-31.993 ; -14.742,-31.993 73.258,-31.993 ; -14.742,-31.993 -14.742,-79.993 73.258,-79.993 73.258,-31.993
  text "公司" at -13.742,-30.993 h5
  text "杭州久天科技有限公司" at 10.258,-30.993 h5
  text "工程" at -13.742,-36.993 h5
  text "设计" at -13.742,-42.993 h5
  text "邵宁鹏" at 10.258,-42.993 h5
  text "日期" at -13.742,-48.993 h5
  text "板厚" at -13.742,-54.993 h5
  text "1mm" at 10.258,-54.993 h5
  text "阻焊油" at -13.742,-60.993 h5
  text "绿色" at 10.258,-60.993 h5
  text "丝印" at -13.742,-66.993 h5
  text "白色" at 10.258,-66.993 h5
  text "板材" at -13.742,-72.993 h5
  text "FR-4" at 10.258,-72.993 h5
  text "其他" at -13.742,-78.993 h5
  text "有铅喷锡，过孔盖油" at 10.258,-78.993 h5

## Dimensions
55,8.4 to 55,-7.4 on Mechanical 15
0,-7.4 to 55,-7.4 on Mechanical 15